# Altium PCB Soldering_Iron_and_dryer.PcbDoc
Units mm, origin at the board's own origin, x right, y up, seen from the top; angles counter-clockwise.
Board outline 141.5 x 41.5 mm, 2 copper layers (Top Layer, Bottom Layer); 63 components, 55 nets, 219 pads, 28 vias.
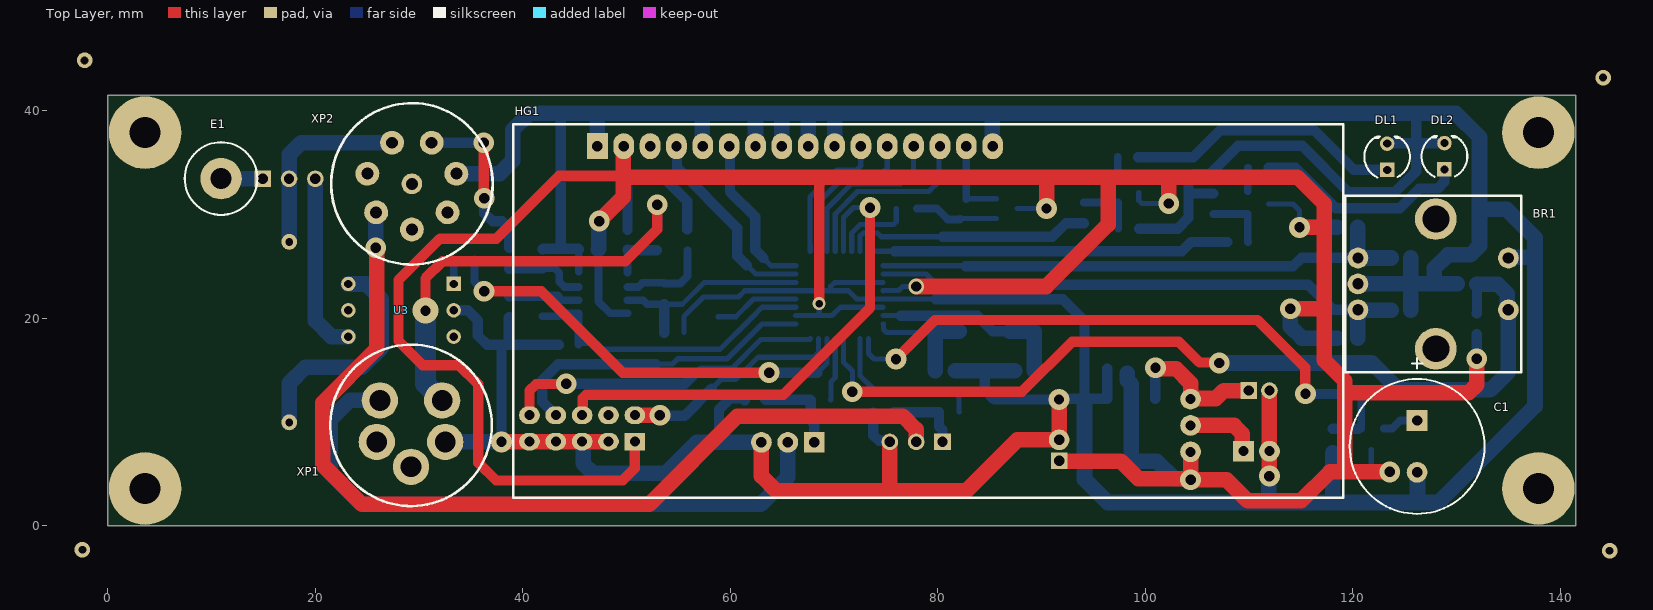
[diagram p0: Top Layer view]
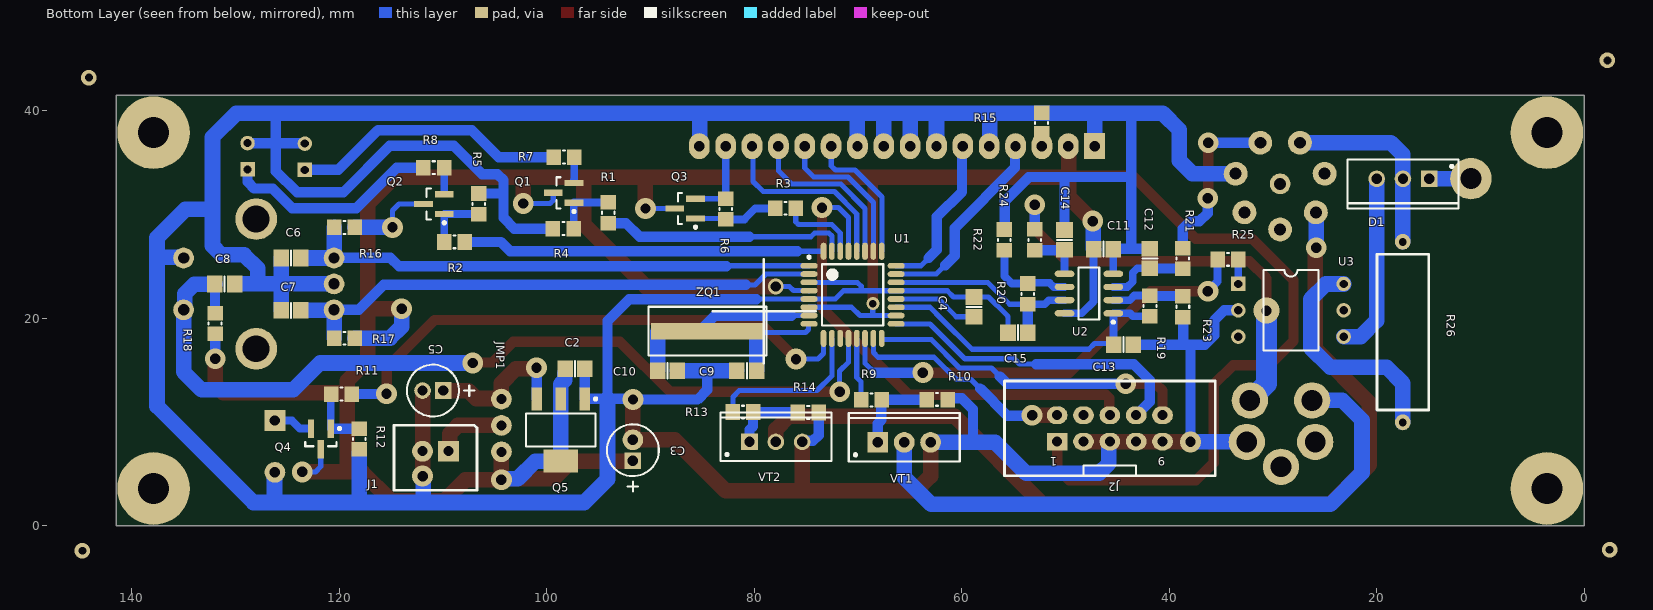
[diagram p1: Bottom Layer view, seen from below]
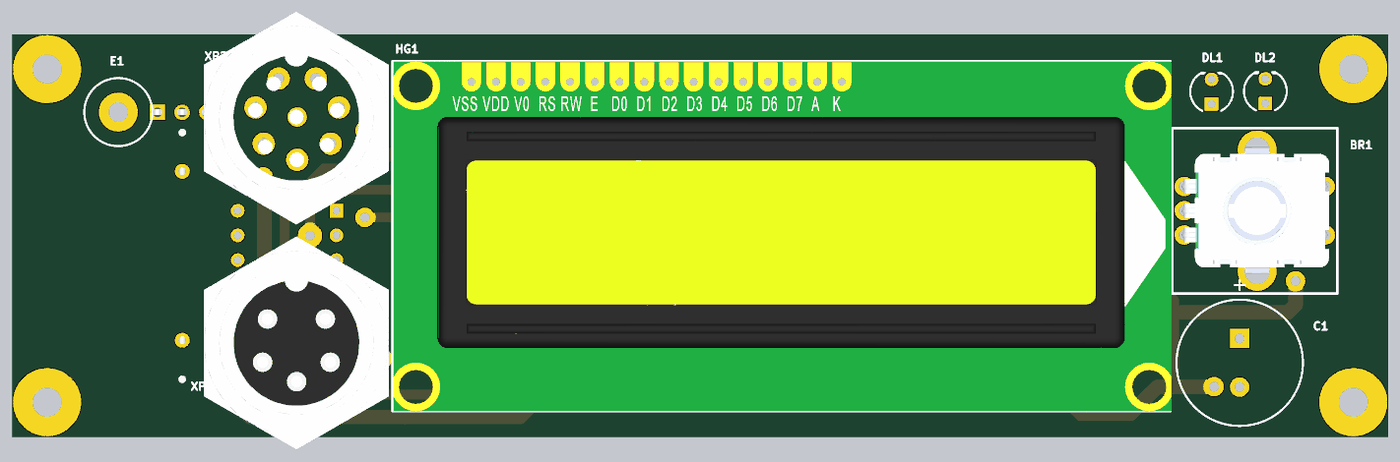
[diagram p2: 3D render of the assembled board from above, using the file's embedded part models]
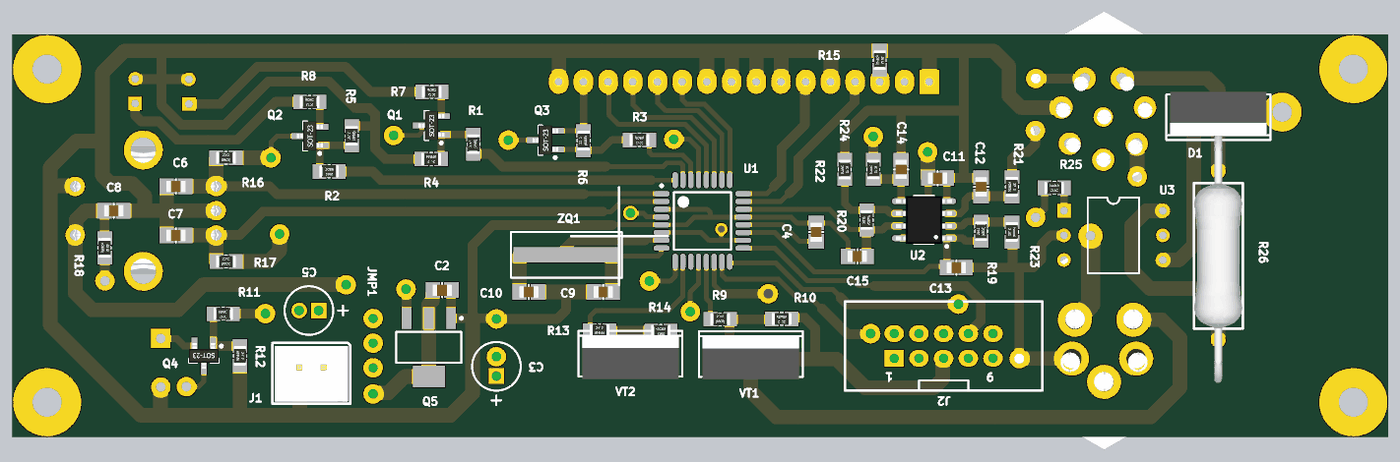
[diagram p3: 3D render of the assembled board from below, using the file's embedded part models]

## Layer stack, top to bottom
Top Solder: solder mask 0.0102, Solder Resist, Dk 3.5
Top Layer: signal copper 0.0356
Dielectric 1: dielectric 0.32, FR-4, Dk 4.8
Bottom Layer: signal copper 0.0356
Bottom Solder: solder mask 0.0102, Solder Resist, Dk 3.5

## Board outline
0,0 141.5,0 141.5,41.5 0,41.5

## Design rules (kind name [scope] priority, off if disabled: settings)
Clearance "Schematic Clearance Constraint" [InNet('NetVT1_2')] p1: gap=0.125 ignorepadtopadclearanceinfootprint=FALSE
Clearance [All] p2: gap=0.125 ignorepadtopadclearanceinfootprint=FALSE
HoleSize [All] p1: absolutevalues=TRUE maxlimit=5 minlimit=0.025 maxpercent=80.000 minpercent=20.000
HoleToHoleClearance [All] p1: gap=0.15 allowstackedmicrovias=TRUE
PolygonConnect [All] p1: connectstyle=Relief reliefconductorwidth=0.254 reliefentries=4 polygonreliefangle="90 Angle" airgapwidth=0.254
RoutingVias [All] p1: holewidth=0.711 width=1.27 viastyle="Through Hole" minholewidth=0.711 minwidth=1.27 maxholewidth=0.711 maxwidth=1.27
SolderMaskExpansion [All] p1: expansion=0.102 istentingtop=FALSE
Width PWR [InNet('NetVT1_2')] p1: maxlimit=5 minlimit=1 preferedwidth=2
Width [All] p2: maxlimit=10 minlimit=0.125 preferedwidth=1
28 further rules are at their usual default settings.

## Classes and differential pairs
net class 220V: NetD1_1
component class 220V_Control: D1 E1 R25 R26 U3
net class PWR: NetVT1_2
component class Sheet_Soldering_Iron: BR1 C2 C3 C4 C5 C6 C7 C8 C9 C10 HG1 J1 J2 JMP1 Q5 R15 R16 R17 R18 U1 XP1 XP2 ZQ1
component class Led_And_Sound: C1 DL1 DL2 Q1 Q2 Q3 Q4 R1 R2 R3 R4 R5 R6 R7 R8 R9 R10 R11 R12 R13 R14 VT1 VT2
component class Amplifier_For_Term: C11 C12 C13 C14 C15 R19 R20 R21 R22 R23 R24 U2

## Components (designator, comment, footprint, x,y, rotation, side; value= is the part's Value field where it differs from the comment)
BR1 "Encoder" PCBComponent_1#1 128.012,23.322 r270 top
C1 "ECAP-1325" ECAP1325 126.213,10.161 r270 top value=1uF
C2 "CAPC_0805" CAPC2012-0805M 97.281,15.144 r0 bottom value=0.1uF
C3 "ECAP-511" ECAP511#1 91.706,6.294 r90 bottom value=10uF
C4 "CAPC_0805" CAPC2012-0805M 58.825,21.112 r270 bottom value=0.1uF
C5 "ECAP-511" ECAP511#2 109.981,13.044 r0 bottom value=100uF
C6 "CAPC_0805" CAPC2012-0805M 124.662,25.822 r180 bottom value=10nF
C7 "CAPC_0805" CAPC2012-0805M 124.662,20.772 r180 bottom value=10nF
C8 "CAPC_0805" CAPC2012-0805M 131.05,23.317 r0 bottom value=10nF
C9 "CAPC_0805" CAPC2012-0805M 80.725,14.95 r180 bottom value=22pF
C10 "CAPC_0805" CAPC2012-0805M 88.375,14.95 r0 bottom value=22pF
C11 "CAPC_0805" CAPC2012-0805M 46.348,26.67 r0 bottom value=0.1uF
C12 "CAPC_0805" CAPC2012-0805M 41.875,25.781 r270 bottom value=0.1uF
C13 "CAPC_0805" CAPC2012-0805M 44.418,17.465 r0 bottom value=0.1uF
C14 "CAPC_0805" CAPC2012-0805M 50.098,27.569 r270 bottom value=0.1uF
C15 "CAPC_0805" CAPC2012-0805M 54.599,18.625 r180 bottom value=0.1uF
D1 "MBR20xx" TO-220#1 17.475,33.45 r0 bottom value=MBR20100
DL1 "LED_D3_TH" LED_D3_TH 123.325,34.31 r90 top value=Red
DL2 "LED_D3_TH" LED_D3_TH 128.85,34.36 r90 top value=Red
E1 "ANT-868-JJB-ST" ANT-XXX-JJB-ST 10.922,33.477 r0 top
HG1 "дисплей 16 сиволов на 2 строки" PCBComponent_1#2 79.1,20.701 r0 top
J1 "CWF-2" CWF-2 109.481,7.194 r270 bottom
J2 "IDC10-2.54-SB" IDC10-2.54-SB 53.35,5.585 r0 bottom
JMP1 "JMP3_2.54" JMP3_2.54 104.381,12.219 r180 bottom
Q1 "BC817" SOT23-3M 98.382,32.102 r0 bottom
Q2 "BC817" SOT23-3M 110.882,31.014 r0 bottom
Q3 "BC817" SOT23-3M 86.669,30.589 r0 bottom
Q4 "BC817" SOT23-3M 121.788,8.373 r270 bottom
Q5 "BCP56" SOT223_N 98.656,9.244 r270 bottom
R1 "RESC_0805_R" RESC2012-0805M 94.082,30.177 r90 bottom value=1k
R2 "RESC_0805_R" RESC2012-0805M 108.906,27.364 r0 bottom value=1k
R3 "RESC_0805_R" RESC2012-0805M 77,30.602 r0 bottom value=1k
R4 "RESC_0805_R" RESC2012-0805M 98.408,28.65 r0 bottom value=1k
R5 "RESC_0805_R" RESC2012-0805M 106.581,31.039 r90 bottom value=1k
R6 "RESC_0805_R" RESC2012-0805M 82.76,30.539 r90 bottom value=1k
R7 "RESC_0805_R" RESC2012-0805M 98.35,35.55 r0 bottom value=1k
R8 "RESC_0805_R" RESC2012-0805M 110.9,34.525 r0 bottom value=1k
R9 "RESC_0805_R" RESC2012-0805M 68.7,12.15 r180 bottom value=100
R10 "RESC_0805_R" RESC2012-0805M 62.375,12.175 r0 bottom value=1k
R11 "RESC_0805_R" RESC2012-0805M 119.8,12.7 r0 bottom value=1k
R12 "RESC_0805_R" RESC2012-0805M 118.075,8.373 r270 bottom value=1k
R13 "RESC_0805_R" RESC2012-0805M 81.1,10.975 r180 bottom value=100
R14 "RESC_0805_R" RESC2012-0805M 74.8,10.925 r0 bottom value=1k
R15 "RESC_0805_R" RESC2012-0805M 52.3,38.825 r270 bottom value=2k
R16 "RESC_0805_R" RESC2012-0805M 119.512,28.772 r180 bottom value=100k
R17 "RESC_0805_R" RESC2012-0805M 119.507,18.097 r180 bottom value=100k
R18 "RESC_0805_R" RESC2012-0805M 131.975,19.5 r270 bottom value=100k
R19 "RESC_0805_R" RESC2012-0805M 41.875,21.2 r90 bottom value=130k
R20 "RESC_0805_R" RESC2012-0805M 53.649,22.362 r90 bottom value=130k
R21 "RESC_0805_R" RESC2012-0805M 38.7,25.781 r270 bottom value=10k
R22 "RESC_0805_R" RESC2012-0805M 52.949,27.569 r270 bottom value=10k
R23 "RESC_0805_R" RESC2012-0805M 38.7,21.125 r90 bottom value=1k
R24 "RESC_0805_R" RESC2012-0805M 55.89,27.568 r270 bottom value=1k
R25 "RESC_0805_R" RESC2012-0805M 34.35,25.675 r0 bottom value=200
R26 "RES_22k_2W" PCBComponent_1#3 4.05,21.975 r90 bottom
U1 "ATmega88A-AU" 32A_N 70.525,22.269 r180 bottom
U2 "LM358AM" SO-8_L 47.748,22.393 r0 bottom
U3 "CNY17" DIP6-400 33.35,23.317 r180 top
VT1 "IRFZ48" TO-220#2 65.55,8.05 r180 bottom
VT2 "IRFZ48" TO-220#1 77.925,8.09 r180 bottom
XP1 "Connector" PCBComponent_1#4 29.233,9.69 r0 top
XP2 "Connector" PCBComponent_1#5 29.315,32.968 r0 top
ZQ1 "Quartz HC49SMD" HC-49SMD 84.507,18.768 r0 bottom value=14.74M

## Footprints (in the part's own frame and the unit in brackets; to place one, negate y for a bottom-side part, rotate by r counter-clockwise, add the part's x,y. Pads: shape width x height; smd on the part's side, far side on the other; paste and mask are expansions set on the pad)
32A_N [mm] "Thin QFP, 32-Leads, Body 7x7mm, Pitch 0.8mm, IPC Medium Density"
  oval 1.65x0.55 smd: 1(-4.2,2.8) 2(-4.2,2) 3(-4.2,1.2) 4(-4.2,0.4) 5(-4.2,-0.4) 6(-4.2,-1.2) 7(-4.2,-2) 8(-4.2,-2.8) 17(4.2,-2.8) 18(4.2,-2) 19(4.2,-1.2) 20(4.2,-0.4) 21(4.2,0.4) 22(4.2,1.2) 23(4.2,2) 24(4.2,2.8)
  oval 0.55x1.65 smd: 9(-2.8,-4.2) 10(-2,-4.2) 11(-1.2,-4.2) 12(-0.4,-4.2) 13(0.4,-4.2) 14(1.2,-4.2) 15(2,-4.2) 16(2.8,-4.2) 25(2.8,4.2) 26(2,4.2) 27(1.2,4.2) 28(0.4,4.2) 29(-0.4,4.2) 30(-1.2,4.2) 31(-2,4.2) 32(-2.8,4.2)
  silkscreen extent -4.33,-2.95 2.95,3.75, body extent -3.5,-3.5 3.5,3.5, height 1.2
ANT-XXX-JJB-ST [mm] "Antenna, 1-Lead, Thru-Hole, Straight, Body 7.0x9.0mm (Dia.xH typ)"
  round 4 hole 2: 1(0,0)
  silkscreen extent -3.5,-3.5 3.5,3.5, body extent -3.5,-3.5 3.5,3.5, height 15.6
CAPC2012-0805M [mm] "Chip Capacitor, Body 2.0x1.3mm, IPC Low Density"
  rect 1.5x1.6 smd: 1(-0.95,0) 2(0.95,0)
  silkscreen extent 0,-0.72 0,0.72, body extent -1,-0.6 1,0.6, height 0.95
CWF-2 [mm]
  rect 2x2 hole 0.965: 1(0,0)
  round 2 hole 0.965: 2(0,-2.5)
  silkscreen extent -2.5,-5.25 3.75,2.75, body extent -2.2,-5 3.55,2.5, height 7
DIP6-400 [mm] "DIP-6 400 (wide)"
  rect 1.4x1.4 hole 0.8: 1(0,0)
  round 1.4 hole 0.8: 2(0,2.54) 3(0,5.08) 4(10.16,5.08) 5(10.16,2.54) 6(10.16,0)
  body extent 2.43,-1.34 7.73,6.42, height 3.55
ECAP511#1 [mm] "Electrolytic capacitor D 5mm H 11mm"
  rect 1.6x1.6 hole 1: 1(0,0)
  round 2 hole 1: 2(2,0)
  silkscreen extent -3,-2.5 3.5,2.5, body extent -1.51,-2.49 3.49,2.5, height 11
ECAP511#2 [mm] "Electrolytic capacitor D 5mm H 11mm"
  rect 1.6x1.6 hole 1: 1(0,0)
  round 1.6 hole 1: 2(2,0)
  silkscreen extent -3,-2.5 3.5,2.5, body extent -1.51,-2.49 3.49,2.5, height 11
ECAP1325 [mm] "Electrolytic capacitor D 13mm H 25mm"
  rect 2x2 hole 1: 1(0,0)
  round 2 hole 1: 2(5,0)
  silkscreen extent -6,-6.5 9,6.5, body extent -4.05,-6.51 8.95,6.49, height 25
HC-49SMD [mm] "Quartz Crystal, SMT; 2 Leads; Body 11.35 x 4.65 x 13.46 mm (LxWxH max)"
  rect 6x1.6 smd: 1(-2.44,0) 2(2.44,0)
  silkscreen extent -5.7,-2.35 5.7,2.35, body extent -5.75,-2.25 5.75,2.25, height 4
IDC10-2.54-SB [mm] "IDC10 2.54 mm pitch, Straight, plastic Box"
  rect 2x1.7 hole 0.965: 1(-2.54,-2.54)
  oval 2x1.7 hole 0.965: 2(-2.54,-5.08) 3(-5.08,-2.54) 4(-5.08,-5.08) 5(-7.62,-2.54) 6(-7.62,-5.08) 7(-10.16,-2.54) 8(-10.16,-5.08) 9(-12.7,-2.54) 10(-12.7,-5.08)
  silkscreen extent -17.78,-8.38 2.54,0.76, body extent -17.78,-8.38 2.54,0.76, height 8.38
JMP3_2.54 [mm] "2 way jumper 2.54 mm"
  round 2 hole 0.965: 1(0,0) 2(0,-2.54) 3(0,-5.08)
  body extent -1.27,-6.35 1.27,1.27, height 7.62
LED_D3_TH [mm] "Through hole LED"
  rect 1.4x1.4 hole 0.8: 1(0,0)
  round 1.4 hole 0.8: 2(2.54,0)
  silkscreen extent -0.71,-2.2 3.24,2.2, body extent -0.33,-1.6 2.87,1.6, height 6.6
PCBComponent_1#1 [mm]
  round 2 hole 1.1: 1(-2.5,-7.5) 2(0,-7.5) 3(2.5,-7.5) 4(-2.5,7) 5(2.5,7)
  round 4 hole 2.6: HOLE(-6.25,0) HOLE(6.25,0)
  silkscreen extent -8.5,-8.75 8.52,8.25, body extent -6.55,-7.73 6.55,7.4, height 32.6
PCBComponent_1#2 [mm]
  rect 2x2.5 hole 1: 1(-31.9,15.9)
  oval 2x2.5 hole 1: 2(-29.36,15.9) 3(-26.82,15.9) 4(-24.28,15.9) 5(-21.74,15.9) 6(-19.2,15.9) 7(-16.66,15.9) 8(-14.12,15.9) 9(-11.58,15.9) 10(-9.04,15.9) 11(-6.5,15.9) 12(-3.96,15.9) 13(-1.42,15.9) 14(1.12,15.9) 15(3.66,15.9) 16(6.2,15.9)
  silkscreen extent -40,-18 40,18, body extent -39.88,-18.03 40.12,17.97, height 13.05
PCBComponent_1#3 [mm]
  round 1.524 hole 0.762: 1(-12,13.45) 2(5.4,13.45)
  silkscreen extent -10.8,10.92 4.2,15.92, body extent -16.4,10.95 9.8,15.95, height 6.5
PCBComponent_1#4 [mm]
  round 3.5 hole 2: 1(-3,2.4) 2(-3.3,-1.6) 3(0,-4) 4(3.3,-1.6) 5(3,2.4)
  silkscreen extent -7.78,-7.78 7.78,7.78, body extent -9.5,-10.97 9.5,10.97, height 17
PCBComponent_1#5 [mm]
  round 2.3 hole 1.15: 1(1.909,3.964) 2(4.29,0.979) 3(3.44,-2.743) 4(0,-4.4) 5(-3.44,-2.743) 6(-4.29,0.979) 7(-1.909,3.964)
  round 2 hole 1.15: 8(0,0)
  silkscreen extent -7.78,-7.78 7.78,7.78, body extent -9.6,-11.07 9.4,10.87, height 17
RESC2012-0805M [mm] "Chip Resistor, Body 2.0x1.3mm, IPC Low Density"
  rect 1.4x1.5 smd: 1(-1,0) 2(1,0)
  silkscreen extent -0.1,-0.63 0.1,0.6, body extent -1,-0.62 1,0.63, height 0.45
SO-8_L [mm] "SOIC, 8-Leads, Body 4.9x3.9mm, Pitch 1.27mm, IPC High Density"
  oval 1.9x0.6 smd: 1(-2.35,1.905) 2(-2.35,0.635) 3(-2.35,-0.635) 4(-2.35,-1.905) 5(2.35,-1.905) 6(2.35,-0.635) 7(2.35,0.635) 8(2.35,1.905)
  silkscreen extent -2.47,-2.5 1,2.88, body extent -2.9,-2.44 2.88,2.46, height 1.45
SOT23-3M [mm] "SOT23, 3-Leads, Body 2.9x1.3mm, Pitch 0.95mm, Lead Span 2.5mm, IPC Low Density"
  rect 1.8x0.6 smd: 1(-1,0.95) 2(-1,-0.95) 3(1,0)
  silkscreen extent -1.12,-1.5 0.7,1.92, body extent -1.32,-1.5 1.32,1.5, height 1.08
SOT223_N [mm] "SOT223, 4-Leads, Body 6.5x3.5mm, Pitch 2.3mm, Lead Span 7mm, IPC Medium Density"
  rect 2.2x1 smd: 1(-3,2.3) 2(-3,0) 3(-3,-2.3)
  rect 2.2x3.3 smd: 4(3,0)
  silkscreen extent -3.12,-3.35 1.6,3.47, body extent -1.85,-3.35 1.85,3.35, height 1.8
TO-220#1 [mm] "TO, Thru-Hole, Vertical, Heatsink Mounted; 3 In-Line Leads; Pitch 2.54 mm"
  rect 1.6x1.6 hole 1: 1(-2.54,0)
  round 1.6 hole 1: 2(0,0) 3(2.54,0)
  silkscreen extent -5.35,-1.85 5.35,2.85, body extent -4.95,-2.11 4.95,2.39, height 22.8
TO-220#2 [mm] "TO, Thru-Hole, Vertical, Heatsink Mounted; 3 In-Line Leads; Pitch 2.54 mm"
  rect 2x2 hole 1: 1(-2.54,0)
  round 2 hole 1: 2(0,0) 3(2.54,0)
  silkscreen extent -5.35,-1.85 5.35,2.85, body extent -4.95,-2.11 4.95,2.39, height 26.8

## Part data
BR1: library part EC11, "Энкодер с кнопкой"
C1: "Capacitor electrolytic 5 mm pitch, 13*25 body"
C2 C4 C6 C7 C8 C9 C10 C11 C12 C13 C14 C15: "Capacitor 0805"
C3 C5: "Capacitor electrolytic 2.5 mm pitch, 5*11 body"
D1: "Schottky Rectifier 20 A TO-220", ComponentLink1Description="Manufacturer Link", ComponentLink1URL=http://www.irf.com/, ComponentLink2Description=Datasheet, ComponentLink2URL=http://www.irf.com/product-info/datasheets/data/mbr2035ct.pdf, DatasheetVersion=Dec-1997, LatestRevisionDate=17-Jul-2002, LatestRevisionNote="Re-released for DXP Platform.", Note="Pin 2 (cathode) is electrically connected to TAB", PackageDescription="TO, Thru-Hole, Vertical, Heatsink Mounted; 3 In-Line Leads; Pitch 2.54 mm", PackageReference=TO-220AB, PackageVersion=Feb-1997, Published=8-Jun-2000, Publisher="Altium Limited"
DL1 DL2: "LED Through hole D3mm"
E1: "Embeddable 1/4-wave Monopole Antenna, JJB Series, 868MHz, 7mm Dia. Package, Straight", ComponentLink1Description="Manufacturer URL", ComponentLink1URL=http://www.linxtechnologies.com/, ComponentLink2Description=Datasheet, ComponentLink2URL=http://www.antennafactor.com/documents/ANT-868-JJB-xx_Data_Sheet.pdf, DatasheetVersion=22/07/2008, PackageDescription="Antenna, Monopole, JJB Series, Thru-Hole, Straight, 7.0 x 9.0 mm (Dia.xH typ)", PackageReference=ANT-XXX-JJB-ST, PackageVersion=22/07/2008
HG1: library part LCD1602, HelpURL=https://cdn-shop.adafruit.com/datasheets/TC1602A-01T.pdf
J2: "IDC10 2.54 mm pitch Straight, plastic Box", LatestRevisionDate=17-Jul-2002, LatestRevisionNote="Re-released for DXP Platform.", Publisher="Altium Limited"
JMP1: "2.54mm 3-pin \"switching\" jumper"
Q1 Q2 Q3 Q4: "BC817 NPN Transistor"
Q5: "NPN Medium Power Transistor", ComponentLink1Description="Manufacturer Link", ComponentLink1URL=http://www.semiconductors.philips.com/, ComponentLink2Description=Datasheet, ComponentLink2URL=http://www.semiconductors.philips.com/acrobat/datasheets/BC639_BCP56_BCX56_7.pdf, DatasheetVersion=10-Oct-2001, LatestRevisionDate=12-Dec-2006, LatestRevisionNote="IPC-7351 Footprint Added.", PackageDescription="4-Pin SOT-223 Package 2.3 mm Pitch, 7 mm Lead Span", PackageReference=SOT223, PackageVersion=Aug-2001, Published=17-Sep-2003, Publisher="Altium Limited"
R1 R2 R3 R4 R5 R6 R7 R8 R9 R10 R11 R12 R13 R14 R15 R16 R17 R18 R19 R20 R21 R22 R23 R24 R25: "Resistor 0805"
R26: "Резистор 2 Вт"
U1: "8-bit AVR Microcontroller, 8KB Flash, 512 Bytes EEPROM, 1KB SRAM, 32-pin TQFP, Industrial Grade (-40°C to 85°C)", Supplier Part Number 1=ATMEGA88A-AU-ND, Code_JEDEC=MS-026-ABA, ComponentLink1Description="Manufacturer Link", ComponentLink1URL=http://www.atmel.com/products/avr/default.asp?, ComponentLink2Description="ATmega48A/48PA/88A/88PA/168A/168PA/328/328P Datasheet", ComponentLink2URL=http://www.atmel.com/dyn/resources/prod_documents/8271.pdf, ComponentLink3Description="ATmega48A/48PA/88A/88PA/168A/168PA/328/328P Summary", ComponentLink3URL=http://www.atmel.com/dyn/resources/prod_documents/8271S.pdf, ComponentLink4Description="Atmel.com Home", ComponentLink4URL=http://www.atmel.com, DatasheetVersion="revA, Jan-2010", PackageDescription="32-Lead, 7x7x1.0 mm Body, 0.8mm Lead Pitch, Thin Profile Plastic Quad Flat Package (TQFP)", PackageReference=32A, PackageVersion="revB, Oct-2001", Published=1-Apr-2010, Publisher="Altium Limited", Supplier 1=Digi-Key, Supplier 2=Mouser, Supplier Part Number 2=556-ATMEGA88A-AU
U2: "Low Power Dual Operational Amplifier", DigiKeyPartNumber=LM358AMXCT-ND, Manufacturer="National Semiconductor", PackageTopMarking=NSZXTT*LM*358AM, PowerWise=N, Code_IPC=SOIC127P600-8, Code_JEDEC=MS-012-AA, ComponentLink1Description="LM358 Datasheet", ComponentLink1URL=http://www.national.com/ds/LM/LM358.pdf, ComponentLink2Description="LM358 Web Page", ComponentLink2URL=http://www.national.com/pf/LM/LM358.html, ComponentLink3Description="M08A Package Page", ComponentLink3URL=http://www.national.com/packaging/folders/m08a.html, CompType=Amplifiers, DatasheetVersion=Oct-2005, LatestRevisionDate=13-Jan-2009, LatestRevisionNote="Sim Model Added.", PackageDescription="SOIC Narrow, 4.9 x 3.9 x 1.45mm, 8 Lead, 1.27mm Pitch", PackageReference=M08A, PackageVersion="revL, Sep-2006", PartNumber=LM358AM, PinCount=8, Published=4-Dec-2008, Publisher="Altium Limited", RoHS=O
U3: "CNY17 phototransistor optoclupler"
VT1 VT2: "HEXFET N-Channel Power MOSFET", ComponentLink1Description="Manufacturer Link", ComponentLink1URL=http://www.irf.com/, ComponentLink2Description=Datasheet, ComponentLink2URL=http://www.irf.com/product-info/datasheets/data/irfz48.pdf, DatasheetVersion=PD-9.758, LatestRevisionDate=17-Jul-2002, LatestRevisionNote="Re-released for DXP Platform.", Note="Pin 2 is electrically connected to pin 4.", PackageDescription="TO, Thru-Hole, Vertical, Heatsink Mounted; 3 In-Line Leads; Pitch 2.54 mm", PackageReference=TO-220AB, PackageVersion=Feb-1997, Published=8-Jun-2000, Publisher="Altium Limited"
XP1: library part GX16-5, "Разъём с 5 контактами типа мама"
XP2: library part GX16-8, "Разъём с 8 контактами типа мама"

## Free pads (board coordinates)
  round 7 hole 3: 1(3.6,3.6) 1(3.6,37.9) 1(137.9,3.6) 1(137.9,37.9)
  round 1.524 hole 0.762: 2(-2.225,44.875) 3(-2.45,-2.3) 4(144.15,43.2) 5(144.775,-2.4)

## Via types
v1: diameter 2, hole 1, Top Layer to Bottom Layer, 25 vias
v2: diameter 1.27, hole 0.711, Top Layer to Bottom Layer, 1 vias
v3: diameter 2.5, hole 1, Top Layer to Bottom Layer, 1 vias
v4: diameter 1.5, hole 1, Top Layer to Bottom Layer, 1 vias

## Nets (pads, with @x,y where several pads share a name; then routed paths per layer and width w, separated by ;. In a path a pad name is that pad's centre, name@x,y a point inside that pad or via, vN(x,y) a via of type N, cw(c..) or ccw(c..) an arc to the next point about the centre after c; other vN are vias at no path point)
+5: C2.2 C3.1 C11.2 HG1.2 J2.1 JMP1.3 Q1.3 Q2.3 Q3.3 Q4.3 Q5.2 Q5.4 R16.2 R17.2 R18.2 U1.4 U1.6 U1.18 U2.8 | length 340.2
  Top Layer w1: 49.675,33.625 49.55,33.75 43.525,33.75 37.45,27.675 32.025,27.675 28.025,23.675 28.025,17.85 30.375,15.5 33.85,15.5 35.7,13.65 35.7,6.1 37.425,4.375 49.65,4.375 50.81,5.535 J2.1 ; v2(68.575,21.425) 68.575,33.575 68.625,33.625 ; v1(90.487,30.589) v1@90.5,30.602
  Top Layer w1.5: v1(47.375,29.375) 49.675,31.675 49.675,33.625 ; HG1.2 49.675,36.536 49.675,33.625 ; v4(77.925,23.075) 90.45,23.075 96.425,29.05 96.425,33.556 96.356,33.625 ; v1@90.5,30.602 90.5,33.625 ; C3.1 91.756,6.244 97.652,6.244 99.35,4.546 104.286,4.546 v1(104.381,4.45) ; v1(102.275,31.075) 102.275,33.625 ; JMP1.3 v1(104.381,4.45) ; v1(114,20.925) 117.2,20.925 117.275,21 ; v1(114.878,28.772) 114.906,28.8 117.275,28.8 ; v1(123.575,5.2) 119.225,5.2 ; v1(131.957,16.1) 131.957,13.6 131.207,12.85 119.225,12.85 ; 49.675,33.625 68.625,33.625 77.075,33.625 90.5,33.625 ; 90.5,33.625 96.356,33.625 ; 96.356,33.625 102.275,33.625 ; 102.275,33.625 114.675,33.625 117.275,31.025 117.275,28.8 ; v1(104.381,4.45) 107.85,4.45 109.875,2.425 115.025,2.425 117.8,5.2 119.225,5.2 ; 117.275,21 117.275,28.8 ; 117.275,21 117.275,15.95 119.225,14 119.225,12.85 ; 119.225,5.2 119.225,12.85
  Bottom Layer w0.5: U1.18 68.575,20.269 ; v2(68.575,21.425) 68.575,20.269 ; U1.6 74.719,21.075 70.625,21.075 69.819,20.269 68.575,20.269 ; U1.4 74.735,22.679 76.229,22.679 76.625,23.075 v4(77.925,23.075) ; Q3.3 v1(90.487,30.589) ; Q1.3 99.382,31.393 99.7,31.075 v1(102.275,31.075) ; Q2.3 114.261,31.014 114.878,30.397 v1(114.878,28.772) ; Q4.3 121.788,5.723 122.311,5.2 v1(123.575,5.2)
  Bottom Layer w0.75: C11.2 47.298,21.628 48.438,20.488 U2.8
  Bottom Layer w1: v1(131.957,16.1) R18.2@131.957,18.5
  Bottom Layer w1.5: C11.2 47.336,26.709 47.336,29.336 v1(47.375,29.375) ; C2.2@98.281,14.694 98.281,14.044 98.656,13.669 Q5.2 Q5.4 101.106,6.244 102.804,4.546 104.286,4.546 v1(104.381,4.45) ; v1(114,20.925) 114,19.2 115.103,18.097 R17.2 ; v1(114.878,28.772) R16.2
GND: BR1.2 BR1.4 C1.2 C2.1 C3.2 C4.1 C5.2 C6.1 C7.1 C8.1 C9.1 C10.1 C11.1 C12.1 C13.1 C14.1 C15.1 DL1.2 DL2.2 HG1.1 HG1.5 HG1.7 HG1.8 HG1.9 HG1.10 HG1.16 J1.2 J2.3 J2.5 J2.7 J2.9 Q5.1 R4.2 R5.2 R10.1 R12.2 R14.1 R15.1 R23.1 R24.1 U1.3 U1.5 U1.21 U2.4 U3.2 VT1.3 VT2.3 XP1.4 XP2.2 | length 539.1
  Top Layer w1.5: v1(37.95,8.09) 37.967,8.108 45.73,8.108 48.253,8.108 J2.3 ; VT1.3 63.01,4.8 64.435,3.375 75.4,3.375 ; VT2.3 75.385,3.39 75.4,3.375 ; C3.2@91.7,8.344 v1(91.7,12.175) ; C3.2 87.669,8.294 82.75,3.375 75.4,3.375 ; v1(111.975,4.8) 111.975,7.188 J1.2 C5.2
  Bottom Layer w0.5: C15.1 55.549,20.175 55.65,20.276 55.65,20.3 57.412,22.062 C4.1 60.787,22.062 61.394,22.669 U1.21 69.7,22.669 ; U1.3 70.069,23.469 69.7,23.1 69.7,22.669 ; 79.825,21.85 79.806,21.869 U1.5 74.717,21.862 72.2,21.862 71.392,22.669 69.7,22.669
  Bottom Layer w0.75: C12.1 C12.1@41.936,26.67 ; U2.4@45.398,24.511 C11.1
  Bottom Layer w1: XP1.4@32.054,8.569 XP1.4 ; U3.2@33.305,20.822 U3.2 34.695,20.777 35.675,19.797 35.675,18.35 36.56,17.465 38.65,17.465 ; v1(37.95,8.09) 37.95,17.4 ; R23.1 38.65,20.075 38.65,17.465 ; C12.1@41.936,26.67 41.966,26.701 43.667,26.701 ; C13.1 38.65,17.465 ; 43.667,39.775 43.667,26.701 ; 43.7,33.625 50.05,33.625 ; C11.1 45.368,26.701 43.667,26.701 ; C14.1 50.098,33.577 50.05,33.625 ; R24.1 55.875,28.583 55.875,31.3 53.55,33.625 50.05,33.625 ; 58.925,8.05 58.925,11.225 60,12.3 61.2,12.3 R10.1@61.4,12.1 ; 62.4,39.775 62.44,39.735 ; 67.52,39.72 67.575,39.775 ; 70.06,39.71 70.125,39.775 ; R14.1 73.8,8.75 74.345,8.205 75.27,8.205 VT2.3 ; 79.825,21.85 92.075,21.85 94.15,19.775 94.15,12.247 ; 84.55,14.95 84.55,13.1 85.475,12.175 v1(91.7,12.175) ; v1@91.772,12.247 94.15,12.247 ; C2.1 96.356,15.119 Q5.1@96.356,12.247 ; Q5.1 Q5.1@96.356,12.247 ; R4.2 103.125,28.65 104.175,29.7 104.175,32.039 ; R5.2 104.175,32.039 ; DL1.2 123.35,36.875 126.125,36.875 ; 126.125,39.775 126.125,36.875 ; DL2.2 128.825,36.875 126.125,36.875 ; BR1.4 BR1.4@135.089,25.9 ; 94.15,12.247 Q5.1@96.356,12.247 ; 104.175,32.039 104.175,33.314 104.761,33.9 106.225,33.9 108.95,36.625 115.125,36.625 119.6,32.15 124.075,32.15 126.125,34.2 126.125,36.875
  Bottom Layer w1.5: XP1.4 v1(37.95,8.09) ; XP2.2 37.773,33.948 39.025,35.2 39.025,38.175 40.625,39.775 43.667,39.775 47.2,39.775 ; J2.5 45.733,8.125 45.825,8.033 45.825,6.025 46.775,5.075 53.8,5.075 56.775,8.05 58.925,8.05 VT1.3 ; HG1.1 47.2,39.775 ; HG1.5 57.325,36.636 57.325,39.775 ; HG1.7 62.44,39.735 ; HG1.8 64.98,39.775 ; HG1.9 67.52,39.72 ; HG1.10 70.06,39.71 ; C9.1 84.55,14.95 C10.1 ; HG1.16 85.275,36.626 85.275,39.775 ; 94.15,12.247 94.15,4.5 96.4,2.25 111.925,2.25 ; v1(111.975,4.8) 111.925,4.75 111.925,2.25 ; R12.2@118.075,7.05 118.075,2.35 117.975,2.25 ; BR1.2 125.612,23.322 ; C7.1 125.612,23.322 ; C6.1 125.612,23.322 ; C1.2 126.25,5.123 126.25,2.25 ; C8.1@130.1,23.322 127.856,23.322 ; 132.3,30.5 134.85,30.5 137.575,27.775 137.575,25.9 ; BR1.4@135.089,25.9 137.575,25.9 ; 47.2,39.775 57.325,39.775 ; 57.325,39.775 62.4,39.775 64.98,39.775 ; 64.98,39.775 67.575,39.775 70.125,39.775 85.275,39.775 ; 85.275,39.775 126.125,39.775 129.925,39.775 132.225,37.475 132.225,26.994 131.356,26.125 129.175,26.125 127.856,24.806 127.856,23.322 ; 111.925,2.25 117.975,2.25 ; 117.975,2.25 126.25,2.25 ; 125.612,23.322 127.856,23.322 ; 126.25,2.25 128.275,2.25 137.575,11.55 137.575,25.9
NetBR1_1: BR1.1 C6.2 R16.1 U1.1 | length 52.3
  Bottom Layer w0.5: U1.1 82.7,25.069
  Bottom Layer w1: 82.7,25.025 114.25,25.025 115.075,25.85 BR1.1@120.512,25.85
  Bottom Layer w1.5: R16.1 120.512,25.85 BR1.1 C6.2
NetBR1_3: BR1.3 C7.2 R17.1 U1.2 | length 53.2
  Bottom Layer w0.5: U1.2 78.881,24.269 79.925,23.225 80.8,23.225
  Bottom Layer w1: 80.8,23.225 115.725,23.225 118.128,20.822 BR1.3
  Bottom Layer w1.5: R17.1 120.507,20.817 BR1.3 120.537,20.797 123.712,20.797 C7.2
NetBR1_5: BR1.5 C8.2 R18.1 U1.12 | length 87
  Top Layer w1: v1(71.775,12.925) 88.125,12.925 92.95,17.75 103.231,17.75 105.231,15.75 v1@107.15,15.75
  Bottom Layer w0.5: U1.12 70.925,15.775 71.775,14.925 v1(71.775,12.925)
  Bottom Layer w1: R18.1 131.987,20.512 C8.2@131.987,23.305
  Bottom Layer w1.5: v1(107.15,15.7) 121.86,15.7 124.46,13.1 133.275,13.1 135.012,14.837 BR1.5 134.916,20.918 134.916,22.359 133.97,23.305 C8.2@131.987,23.305
NetC1_1: C1.1 Q4.2 | length 3.5
  Bottom Layer w0.75: Q4.2@123,9.392 123.817,9.392 124.575,10.15 126.202,10.15 C1.1
NetC4_2: C4.2 U1.20 | length 8.2
  Bottom Layer w0.5: C4.2 60.537,20.162 62.244,21.869 U1.20
NetC5_1: C5.1 JMP1.1 Q5.3 | length 14.5
  Top Layer w1: JMP1.1 JMP1.1@104.437,12.275
  Top Layer w1.5: v1(101,15.25) 101.096,15.154 102.971,15.154 104.381,13.744 JMP1.1 ; JMP1.1@104.437,12.275 106.8,12.275 107.569,13.044 C5.1
  Bottom Layer w1: Q5.3 100.956,15.206 v1(101,15.25)
NetC9_2: C9.2 U1.8 ZQ1.1 | length 11.8
  Bottom Layer w0.5: U1.8 74.752,19.469 74.775,19.446 74.775,18.943 75.068,18.65 ZQ1.1@79.775,18.65
  Bottom Layer w1.5: C9.2 79.775,18.65 79.775,18.718 79.825,18.768 ZQ1.1
NetC10_2: C10.2 U1.7 ZQ1.2 | length 19
  Bottom Layer w0.5: U1.7 76.449,20.269
  Bottom Layer w1: 76.449,20.269 83.806,20.269 85.307,18.768 ZQ1.2
  Bottom Layer w1.5: ZQ1.2 89.275,18.768 89.325,18.718 C10.2
NetC12_2: C12.2 R21.2 U2.3 | length 8
  Bottom Layer w0.75: C12.2 41.887,24.843 43.087,24.843 43.526,24.404 43.526,23.542 44.04,23.028 U2.3
  Bottom Layer w1: R21.2 38.725,24.806 41.85,24.806 C12.2
NetC13_2: C13.2 R19.1 U1.19 U2.1 | length 29.6
  Bottom Layer w0.5: C13.2 45.383,17.481 45.477,17.575 47.2,17.575 47.756,17.019 55.519,17.019 59.019,17.019 61.952,19.952 63.069,21.069 U1.19
  Bottom Layer w0.75: R19.1 43.5,20.2 43.788,20.488 U2.1 45.383,20.473 C13.2@45.383,17.481
NetC14_2: C14.2 R22.2 U2.5 | length 5.1
  Bottom Layer w0.75: U2.5@50.104,24.41 C14.2@50.104,26.613
  Bottom Layer w1: C14.2 50.104,26.613 50.148,26.569 R22.2
NetC15_2: C15.2 R20.1 U1.22 U2.7 | length 20
  Bottom Layer w0.5: R20.1 55.387,21.362 57.494,23.469 U1.22
  Bottom Layer w0.75: U2.7 51.615,21.758 52.011,21.362 R20.1
  Bottom Layer w1: C15.2 R20.1
NetD1_1: D1.1 E1.1 | length 4.2
  Bottom Layer w1.5: E1.1@10.922,33.253 E1.1 10.936,33.464 14.921,33.464 D1.1
NetD1_2: D1.2 R26.2 XP2.7 | length 18.8
  Bottom Layer w1.5: R26.2 17.5,33.398 17.475,33.423 D1.2 17.494,33.469 17.494,35.794 18.65,36.95 XP2.7@27.406,36.95
NetD1_3: D1.3 U3.4 | length 17.5
  Bottom Layer w1: D1.3@20.025,33.425 D1.3@20.05,33.45
  Bottom Layer w1.5: D1.3 20.015,19.785 21.55,18.25 23.177,18.25 U3.4
NetDL1_1: DL1.1 R7.2 | length 26.6
  Bottom Layer w1: R7.2 104.65,35.55 107.225,38.125 116.275,38.125 120.09,34.31 DL1.1
NetDL2_1: DL2.1 R8.2 | length 20.8
  Bottom Layer w1: R8.2 114.45,34.525 118.35,30.625 124.525,30.625 126.414,32.514 128.189,32.514 128.85,33.175 DL2.1
NetHG1_3: HG1.3 R15.2
NetHG1_4: HG1.4 U1.23 | length 19.3
  Bottom Layer w0.5: HG1.4@54.875,36.504 HG1.4@54.896,36.525 ; 61.59,25.135 62.456,24.269 U1.23
  Bottom Layer w1: HG1.4@54.875,36.504 54.875,34.5 60.673,28.702 60.673,26.052 61.59,25.135
NetHG1_6: HG1.6 U1.24 | length 15.5
  Bottom Layer w0.5: 63.175,25.822 63.928,25.069 U1.24
  Bottom Layer w1: HG1.6@59.976,36.525 59.976,32.224 62.4,29.8 62.4,26.597 63.175,25.822
NetHG1_11: HG1.11 U1.25 | length 13.3
  Bottom Layer w0.5: U1.25 67.725,27.033 67.7,27.058 67.7,31.696 70.304,34.3 72.182,34.3 72.579,34.697 72.579,36.58 HG1.11
NetHG1_12: HG1.12 U1.26 | length 14.8
  Bottom Layer w0.5: U1.26 68.525,31.17 70.98,33.625 74.275,33.625 75.14,34.49 HG1.12
NetHG1_13: HG1.13 U1.27 | length 16.4
  Bottom Layer w0.5: U1.27 69.325,30.589 71.675,32.939 76.389,32.939 77.68,34.23 HG1.13
NetHG1_14: HG1.14 U1.28 | length 18.3
  Bottom Layer w0.5: U1.28 70.125,30.075 72.274,32.224 79.147,32.224 80.125,33.202 80.125,36.506 HG1.14
NetHG1_15: HG1.15 Q3.2 R6.2 | length 8
  Bottom Layer w0.5: R6.2 Q3.2
  Bottom Layer w0.75: R6.2@82.76,31.502 HG1.15
NetJ2_2: J2.2 U1.15 | length 21.7
  Top Layer w1: J2.2 J2.2@50.813,10.662 ; v1@53.222,10.662 v1(53.225,10.659)
  Top Layer w1.5: J2.2@50.813,10.662 v1@53.222,10.662
  Bottom Layer w0.5: J2.2@50.56,11.2 J2.2@50.625,11.265 ; v1(53.225,10.659) v1@53.284,10.6 ; 58.244,13.244 59.1,14.1 60.525,14.1 62.675,16.25 68.075,16.25 68.525,16.7 U1.15
  Bottom Layer w1: v1@53.284,10.6 55.6,10.6 58.244,13.244
NetJ2_6: J2.6 U1.29 | length 48.8
  Top Layer w1: J2.6@45.775,10.665 45.775,12.3 46.125,12.65 65.125,12.65 73.475,21 v1(73.475,30.677)
  Bottom Layer w0.5: U1.29 70.925,29.71 71.892,30.677 v1(73.475,30.677)
NetJ2_8: J2.8 U1.17 | length 30.6
  Bottom Layer w0.5: 52.875,15.6 54.425,15.6 54.925,16.1 59.7,16.1 63.069,19.469 U1.17
  Bottom Layer w1: J2.8 41.9,11.955 41.9,14.05 43.425,15.575 52.85,15.575
NetJ2_10: J2.10 U1.16 | length 31.6
  Top Layer w1: J2.10 40.65,13.015 41.31,13.675 v1@44.2,13.675
  Bottom Layer w0.5: 56.325,14.4 57.15,15.225 60.225,15.225 62.95,17.95 67.702,17.95 67.702,18.035 67.725,18.058 U1.16
  Bottom Layer w1: v1(44.2,13.7) 55.625,13.7 56.325,14.4
NetQ1_1: Q1.1 R1.2 R4.1 | length 5.8
  Bottom Layer w0.75: R1.2 94.095,31.164 97.37,31.164 Q1.1 97.395,31.139 97.395,28.663 R4.1
NetQ1_2: Q1.2 R7.1 | length 2.2
  Bottom Layer w0.75: R7.1 97.366,35.534 97.366,33.366 Q1.2@97.382,33.35
NetQ2_1: Q2.1 R2.2 R5.1 | length 5.8
  Bottom Layer w0.75: R5.1 106.594,30.051 Q2.1@109.869,30.051 ; Q2.1@109.882,29.85 109.882,27.388 R2.2
NetQ2_2: Q2.2 R8.1 | length 2.3
  Bottom Layer w0.75: Q2.2@109.891,32.259 109.891,34.516 R8.1
NetQ3_1: Q3.1 R3.2 R6.1 | length 8.1
  Bottom Layer w0.5: R6.1@82.175,29.602 82.193,29.62 85.65,29.62 Q3.1
  Bottom Layer w0.75: R3.2 79.9,30.602 80.958,29.544 82.117,29.544 R6.1@82.175,29.602
NetQ4_1: Q4.1 R11.2 R12.1 | length 5.8
  Bottom Layer w0.75: R11.2 120.819,12.681 Q4.1@120.819,9.392
  Bottom Layer w1: R12.1 120.537,9.373
NetR1_1: R1.1 U1.31 | length 23.9
  Bottom Layer w0.5: U1.31 72.525,27.95 72.818,28.243 74.176,28.243 74.556,27.864 80.465,27.864
  Bottom Layer w1: 80.465,27.864 91.056,27.864 92.369,29.177 R1.1
NetR2_1: R2.1 U1.32 | length 35
  Bottom Layer w0.5: U1.32 75.85,26.47
  Bottom Layer w1: 75.85,26.47 103.545,26.47 104.439,27.364 R2.1
NetR3_1: R3.1 U1.30 | length 7.8
  Bottom Layer w0.5: U1.30 71.725,28.243 72.532,29.05 75.74,29.05 76,29.31 R3.1
NetR9_1: R9.1 U1.13 | length 6.1
  Bottom Layer w0.5: R9.1 69.725,12.175 69.725,13.9 70.125,14.3 U1.13
NetR9_2: R9.2 R10.2 VT1.1 | length 8.6
  Bottom Layer w1: R10.2 63.4,12.15 R9.2 67.75,12.1 67.75,10.2 68.1,9.85 68.1,8.06 VT1.1
NetR11_1: R11.1 U1.9 | length 53.1
  Top Layer w1: v1(75.979,16.076) 79.753,19.85 110.806,19.85 115.425,15.231 115.425,12.75 v1(115.45,12.725)
  Bottom Layer w0.5: U1.9 73.325,16.6 73.849,16.076 v1(75.979,16.076)
  Bottom Layer w1: v1(115.45,12.725) 115.462,12.713 118.787,12.713 R11.1
NetR13_1: R13.1 U1.10 | length 15.5
  Bottom Layer w0.5: U1.10 72.525,14.475 73.95,13.05 81.45,13.05 82.067,12.433 82.067,11.008 R13.1
NetR13_2: R13.2 R14.2 VT2.1 | length 7.4
  Bottom Layer w1: R14.2 75.825,10.95 80.075,10.95 R13.2 80.125,10.95 80.125,9.6 80.465,9.26 VT2.1
NetR19_2: R19.2 R23.2 U2.2 | length 6.9
  Bottom Layer w0.75: R19.2 43.373,22.2 43.815,21.758 U2.2
  Bottom Layer w1: R23.2 38.737,22.162 41.837,22.162 R19.2
NetR20_2: R20.2 R24.2 U2.6 | length 8.8
  Bottom Layer w0.75: U2.6 51.146,23.028 51.555,23.437 53.574,23.437 R20.2 55.187,23.362 55.89,24.065 R24.2
NetR21_1: R21.1 XP2.1 | length 16.7
  Top Layer w1: v1(36.25,36.933) 36.25,31.625 v1(36.3,31.575)
  Bottom Layer w1: XP2.1 v1(36.25,36.933) ; v1(36.3,31.575) 36.3,30.15 37.1,29.35 38,29.35 38.7,28.65 R21.1
NetR22_1: R22.1 XP1.5 | length 41.8
  Top Layer w1: v3(30.625,20.75) 30.625,23.85 32.275,25.5 49.88,25.5 52.962,28.582 v1(52.962,30.963)
  Bottom Layer w1: XP1.5@31.983,12.09 XP1.5 ; R22.1 52.956,28.576 52.956,30.956 v1(52.962,30.963)
  Bottom Layer w2: v3(30.625,20.75) 30.625,13.698 XP1.5
NetR25_1: R25.1 U3.1 | length 2.4
  Bottom Layer w0.75: U3.1 R25.1
NetR25_2: R25.2 U1.14 | length 42.5
  Top Layer w1: v1(36.275,22.625) 41.775,22.625 49.625,14.775 v1(63.75,14.775)
  Bottom Layer w0.5: 68.419,14.775 69.325,15.681 U1.14
  Bottom Layer w0.75: R25.2 35.35,23.55 v1(36.275,22.625)
  Bottom Layer w1: v1(63.75,14.775) 68.419,14.775
NetR26_1: R26.1 U3.6 | length 22.5
  Bottom Layer w1.5: R26.1 17.5,13.75 19.05,15.3 24.5,15.3 26.375,17.175 26.375,21.85 24.908,23.317 U3.6
NetVT1_2: VT1.2 XP1.1 | length 60.8
  Bottom Layer w1.5: XP1.1 23.315,12.09 21.425,10.2 21.425,5.125 24.475,2.075 62.95,2.075 65.55,4.675 VT1.2
  Bottom Layer w2.5: XP1.1@26.041,11.899 XP1.1
NetVT2_2: VT2.2 XP2.5 | length 90.6
  Top Layer w1.5: v1(25.825,26.8) 25.921,26.704 25.921,17.046 20.725,11.85 20.725,5.875 24.525,2.075 52.2,2.075 60.7,10.575 76.65,10.575 77.925,9.3 VT2.2
  Bottom Layer w1.5: v1(25.825,26.8) 25.825,30.175 XP2.5
VCC: J1.1 JMP1.2 | length 7.1
  Top Layer w1.5: JMP1.2 108.571,9.679 109.35,8.9 109.35,7.325 J1.1
pads on no net: BR1.HOLE J2.4 U1.11 U3.3 U3.5 XP1.2 XP1.3 XP2.3 XP2.4 XP2.6 XP2.8

## Text inside footprints (layer, text, board x,y; h text height)
J2: Bottom Overlay "9" at 40.396,6.6 h0.8 r180; Bottom Overlay "1" at 50.81,6.6 h0.8 r180